# EAGLE board Castle_Touch_Adapter3.3 (EAGLE 9.3.0)
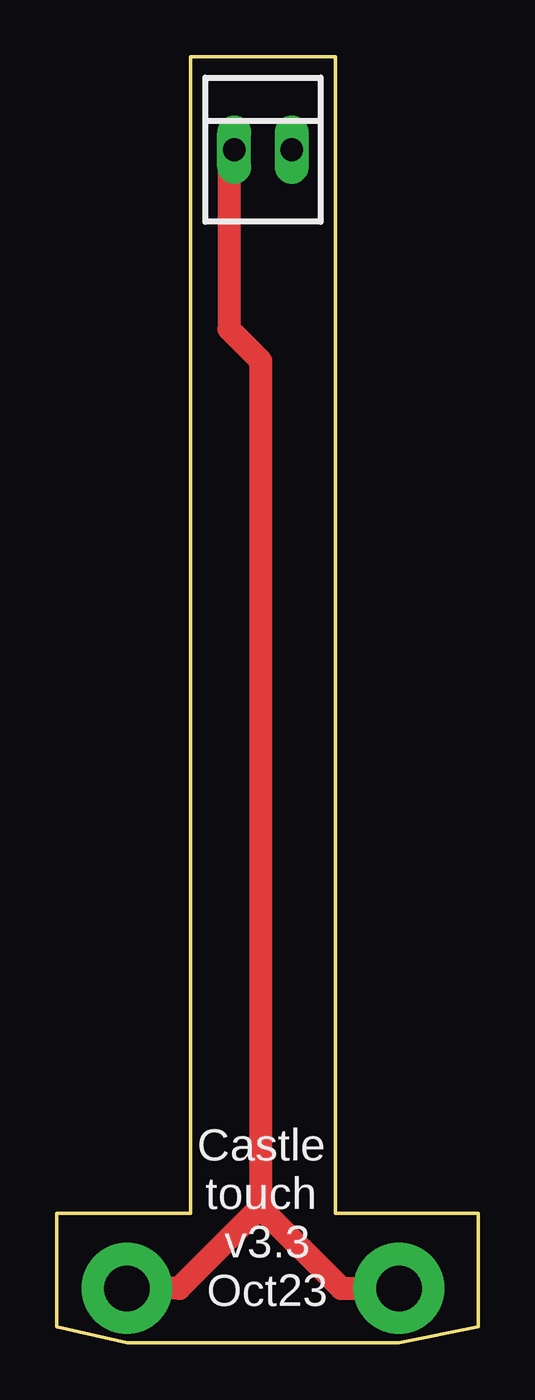
[diagram p0: board, top side]
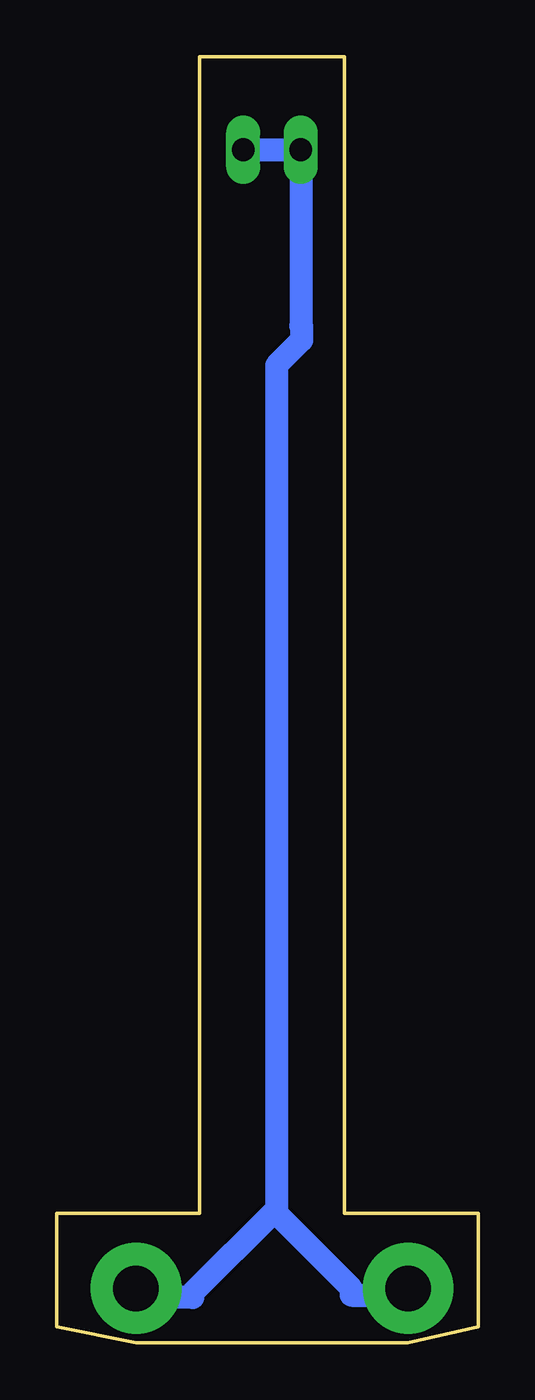
[diagram p1: board, bottom side, seen from below]

Size 18.6 x 56.7 mm. Coordinates in mm from the lower left corner, seen from the top.
Outline: 5.9,56.7 5.9,5.7 0,5.7 0,0.7 3.1,0 15.1,0 18.6,0.7 18.6,5.7 12.3,5.7 12.3,56.7 5.9,56.7
Copper layers (1*16): Top 0.035mm / dielectric 1.5mm / Bottom 0.035mm
Design rules "default": minimum track width 6mil, minimum drill 0.35mm, track to track 6mil, track to pad 6mil, pad to pad 6mil, via to via 6mil, smd to smd 6mil, copper to edge 40mil, drill to drill 6mil, minimum pad ring 10mil, minimum via ring 8mil, stop-mask expansion 4mil, vias tented up to drill 0mil, thermal gap 10mil

## Footprints (pad centres in the part's own frame; a part is rotated, then mirrored left to right if it is on the bottom)
22-23-2021 = drill 1 long: 1 -1.27,0; 2 1.27,0

## Placement (x,y rotation side)
X1  22-23-2021  [22-23-2021]  9.1,52.6 0 top

## Library data of the parts
X1 = con-molex; MF: MOLEX; MPN: 22-23-2021; OC_FARNELL: 1462926; OC_NEWARK: 25C3832

## Nets
N$1: X1.1 X1.2

## Tracks (layer width: path | path; a pad name or v marks a point on that pad's centre or on a via)
N$1  (via drill 2 pad 4)
  Top 1.016: 8.98,5.98 5.4,2.4 v3.1,2.4 | 8.98,5.98 12.56,2.4 v15.1,2.4 | X1.1 7.6,52.37 7.6,44.7 9,43.3 9,6 8.98,5.98
  Bottom 1.016: v3.1,2.4 3.4,2.1 5.6,2.1 5.6,2.4 8.9,5.7 | 8.9,5.7 9,5.8 12.6,2.2 12.6,2 15.5,2 15.6,2.1 15.4,2.1 v15.1,2.4 | 8.9,5.7 8.9,43.1 7.8,44.2 7.8,44.8 7.83,44.83 X1.1 X1.2

## Text on the board
tNames: Castle / touch / v3.3 / Oct23